# Altium PCB NanoEEG_v3.PcbDoc (part 2 of 2)
Units mm, origin at the board's own origin, x right, y up, seen from the top; angles counter-clockwise.
Board outline 66 x 52 mm, 4 copper layers (Top Layer, Gound Plane 1, Power Plane 1, Bottom Layer), stack 1.87 mm thick; 74 components, 80 nets, 375 pads, 142 vias.
Unrouted connection lines stored in the file: 89.
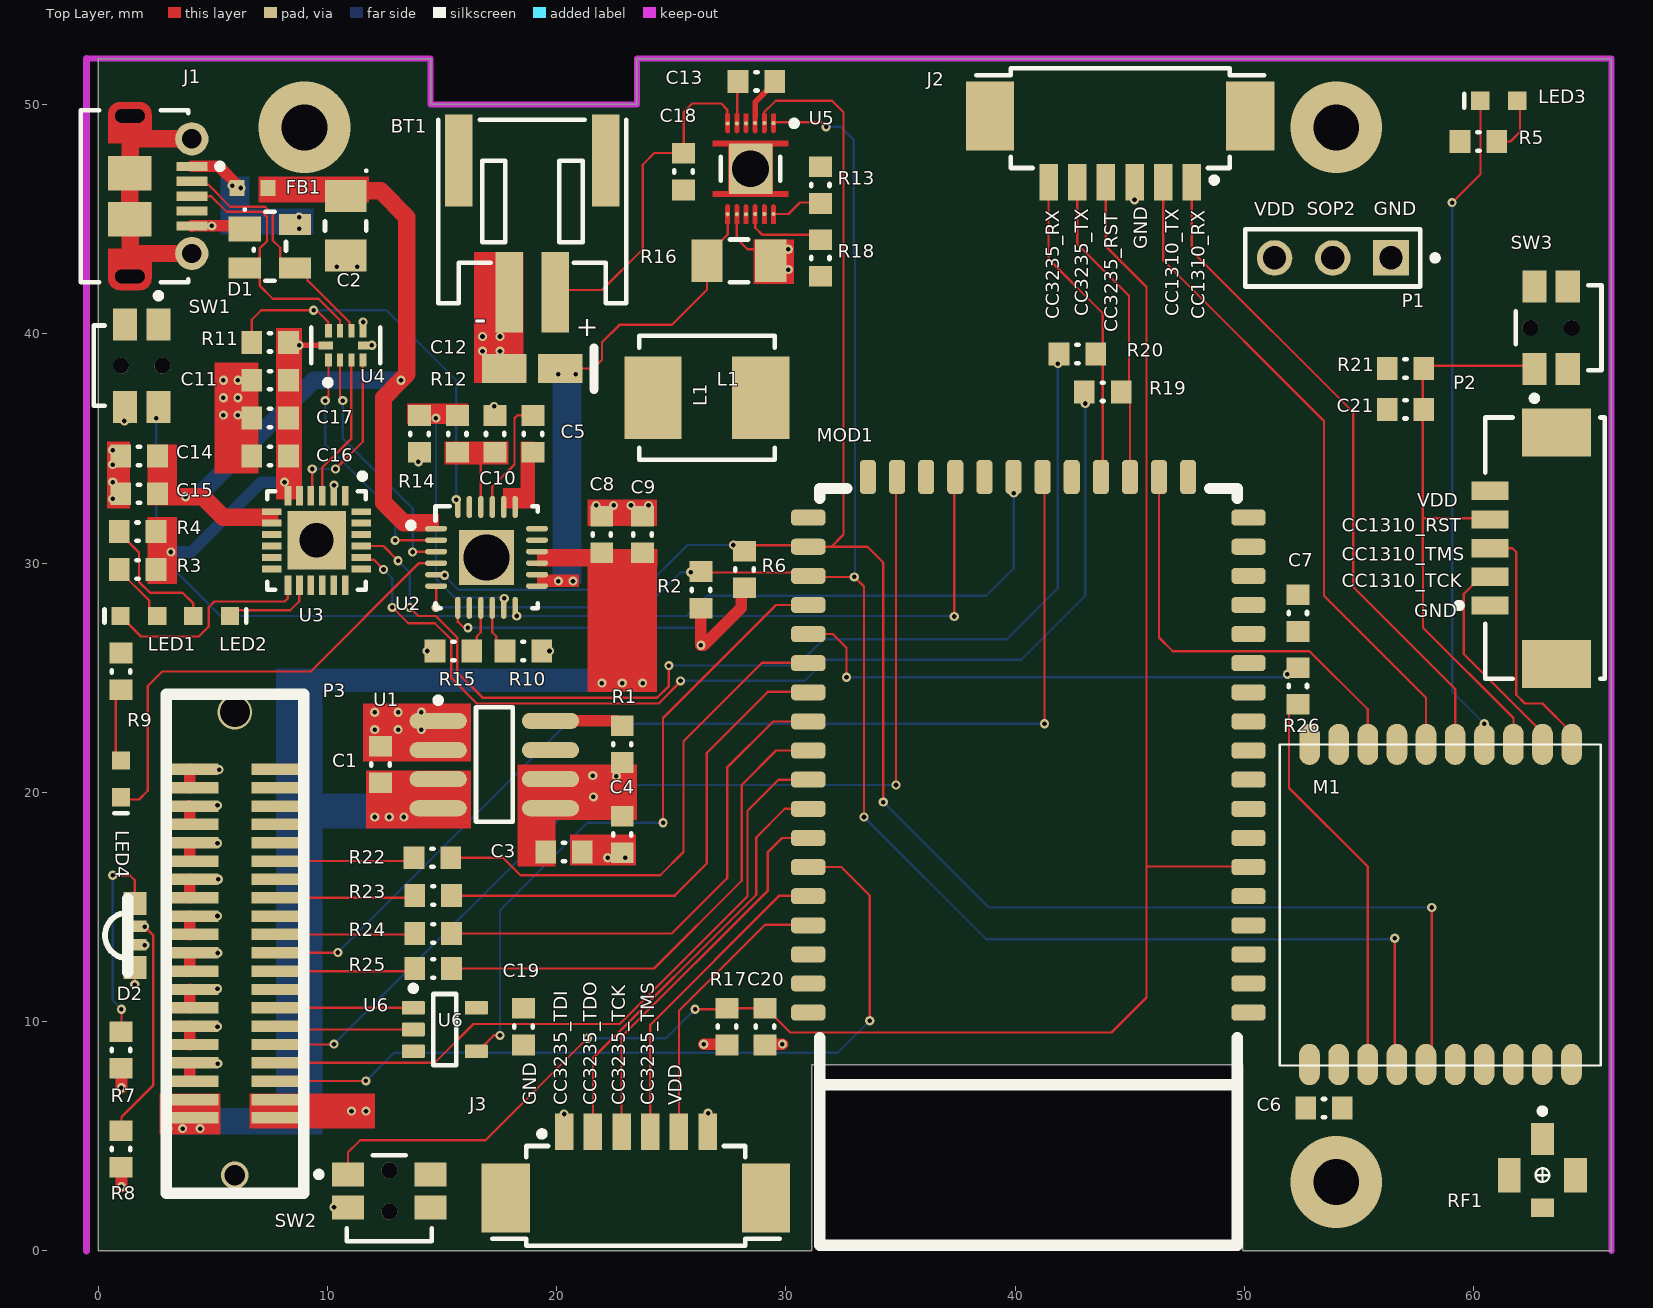
[diagram p0: Top Layer view]

## Via types
v1: diameter 0.4, hole 0.2, Top Layer to Bottom Layer, 136 vias
v2: diameter 4, hole 2, Top Layer to Bottom Layer, 3 vias
v3: diameter 2, hole 1.5, Top Layer to Bottom Layer, 1 vias
v4: diameter 1.2, hole 0.9, Top Layer to Bottom Layer, 1 vias
v5: diameter 1.5, hole 1.3, Top Layer to Bottom Layer, 1 vias

## Nets (pads, with @x,y where several pads share a name; then routed paths per layer and width w, separated by ;. In a path a pad name is that pad's centre, name@x,y a point inside that pad or via, vN(x,y) a via of type N, cw(c..) or ccw(c..) an arc to the next point about the centre after c; other vN are vias at no path point) (continued)
I2C_SDA_B: (continued)
  Top Layer w0.1: v1(14.732,28.067) 14.74,28.075 U2.6 ; R2.2 26.327,29.591 30.822,29.591 31.02,29.393 v1(32.979,29.393) 33.401,28.972 v1(33.401,18.923) ; 29.556,49.224 31.548,49.224 v1(31.75,49.022) ; v1(56.553,13.635) 56.553,8.217 M1.14
  Bottom Layer w0.1: v1(14.732,28.067) 23.876,28.067 25.409,29.6 v1(25.84,29.6) ; v1(31.75,49.022) 32.385,49.022 32.962,48.445 32.962,43.387 33.007,43.342 v1@33.007,29.35 ; v1(33.401,18.923) 38.735,13.589 56.507,13.589 v1(56.553,13.635)
INT2_ACCEL: MOD1.23
Mod1_nDRDY: P3.12 U6.2 | length 5.9
  Top Layer w0.1: P3.12 8.078,9.652 U6.2
Mod2_nCS: MOD1.24 P3.20 | length 48.3
  Top Layer w0.1: P3.20 10.441,13 v1(10.455,13.014) ; MOD1.24 41.275,33.668 v1(41.275,22.987)
  Bottom Layer w0.1: v1(10.455,13.014) 20.428,22.987 v1(41.275,22.987)
Mod2_nDRDY: P3.14 U6.1 | length 5.8
  Top Layer w0.1: P3.14 7.932,10.602 U6.1
Mod_MISO: P3.26 R23.2 | length 5.9
  Top Layer w0.1: P3.26 13.719,15.4 R23.2
Mod_MOSI: P3.22 R24.2 | length 5.9
  Top Layer w0.1: P3.22 13.77,13.8 R24.2
Mod_nCS: P3.18 R25.2 | length 5.9
  Top Layer w0.1: P3.18 13.694,12.2 R25.2
Mod_nDRDY: MOD1.34 U6.4 | length 28.4
  Top Layer w0.1: U6.4 16.526,8.672 17.253,9.398 v1(17.526,9.398) ; v1(24.638,18.669) 24.638,23.241 29.567,28.17 MOD1.34
  Bottom Layer w0.1: v1(17.526,9.398) 17.526,14.859 21.336,18.669 v1(24.638,18.669)
Mod_nPWDN: MOD1.40 P3.8 | length 30.3
  Top Layer w0.1: P3.8 14.677,8.2 16.371,9.894 22.745,9.894 28.321,15.469 28.321,19.197 29.674,20.55 MOD1.40
Mod_nRESET: MOD1.43 P3.6 | length 35.5
  Top Layer w0.1: P3.6 7.941,7.411 v1(11.677,7.411) ; MOD1.43 32.409,16.74 33.655,15.494 v1(33.655,10.033)
  Bottom Layer w0.1: v1(11.677,7.411) 12.901,8.636 32.258,8.636 v1(33.655,10.033)
Mod_SCLK: P3.30 R22.2 | length 5.9
  Top Layer w0.1: P3.30 13.63,17 R22.2
Mod_START: MOD1.29 P3.10 | length 45
  Top Layer w0.1: P3.10 10.27,9 v1(10.287,9.017) ; v1(34.798,20.32) 34.798,33.705 MOD1.29
  Bottom Layer w0.1: v1(10.287,9.017) 21.59,20.32 v1(34.798,20.32)
NetC5_1: C5.1 U2.21 | length 5.1
  Top Layer w0.1: U2.21 17.19,33.323 18.161,34.294 18.161,36.322 18.288,36.449 18.954,36.449 C5.1
NetC5_2: C5.2 L1.1 U2.19 U2.20
NetC13_2: C13.2 U5.5 | length 1.7
  Top Layer w0.1: 27.871,49.354 27.891,49.373 27.891,49.515 27.869,49.537 27.869,50.968 C13.2
NetD2_2: D2.2 R8.2 | length 9.6
  Top Layer w0.1: R8.2 1.016,5.261 1.016,5.842 2.409,7.235 2.409,13.76 v1(2.025,14.144)
NetD2_4: D2.4 R7.2 | length 9
  Top Layer w0.1: v1(0.635,16.383) 1.381,16.383 1.6,16.164 D2.4 ; R7.2 1.016,9.579 v1(1.016,10.541)
  Bottom Layer w0.1: v1(0.635,16.383) 0.635,10.922 v1(1.016,10.541)
NetIC1_12: 
NetLED1_2: LED1.2 R3.1 | length 2.7
  Top Layer w0.1: R3.1 0.922,29.668 2.228,28.362 2.228,28.036 LED1.2
NetLED2_2: LED2.2 R4.1 | length 5.9
  Top Layer w0.1: R4.1 0.922,31.319 1.786,30.455 1.786,29.175 2.259,28.702 3.683,28.702 4.153,28.232 LED2.2
NetLED3_2: LED3.2 R5.1 | length 2.5
  Top Layer w0.1: R5.1 61.595,48.387 62.014,48.806 LED3.2@62.014,50.165
NetLED4_2: LED4.2 R9.1 | length 3.1
  Top Layer w0.1: LED4.2@0.7,21.39 0.77,21.46 R9.1@0.77,24.473
NetM1_13: M1.13 R26.1 | length 17.3
  Top Layer w0.1: R26.1 51.943,23.457 51.943,20.193 55.372,16.764 M1.13
NetM1_19: M1.19 RF1.1
NetMOD1_36: MOD1.36 R22.1 | length 22.5
  Top Layer w0.1: R22.1 17.657,17.145 18.419,16.383 24.511,16.383 25.527,17.399 25.527,22.225 28.956,25.654 MOD1.36@30.869,25.654
NetMOD1_37: MOD1.37 R23.1 | length 22.2
  Top Layer w0.1: R23.1 25.146,15.494 26.543,16.891 26.543,21.717 29.21,24.384 MOD1.37@31.056,24.384
NetMOD1_38: MOD1.38 R24.1 | length 22.2
  Top Layer w0.1: R24.1 25.019,13.843 27.432,16.256 27.432,21.082 29.44,23.09 MOD1.38
NetMOD1_39: MOD1.39 R25.1 | length 21.9
  Top Layer w0.1: R25.1 24.243,12.319 28.067,16.143 28.067,20.32 29.567,21.82 MOD1.39
NetR10_2: R10.2 U2.10 | length 2.5
  Top Layer w0.1: U2.10 17.19,26.981 17.364,26.807 17.364,26.612 17.56,26.416 R10.2@17.695,26.416 ; R10.2@17.342,26.562 R10.2
NetR12_2: R12.2 R14.1 U2.11 | length 10.3
  Bottom Layer w0.1: v1(14.732,36.322) 14.732,29.312 15.552,28.492 17.673,28.492 v1(17.709,28.456)
PG_3.3VD: R1.1 U1.8 | length 3.2
  Top Layer w0.508: U1.8 22.594,23.114 22.81,22.898 R1.1
PGau_BIN: R18.1 U5.10 | length 3.7
  Top Layer w0.1: U5.10 28.656,44.623 28.956,44.323 31.28,44.323 R18.1
PGau_OUT: R13.2 U5.12 | length 2.3
  Top Layer w0.1: U5.12 30.111,45.224 30.607,45.72 31.458,45.72 R13.2
StatusLED_1: D2.3 MOD1.26 | length 0.7
  Top Layer w0.1: v1(1.595,11.611) 1.6,11.616 D2.3
StatusLED_2: D2.1 MOD1.28
  other v1: 2.032,13.335
SYS_PWR: C1.2 C8.2 C9.2 L1.2 P3.1 P3.3 U1.3 U1.4 U2.15 U2.16
  other v1: 3.048,5.334 3.683,5.334 4.445,5.334 12.065,18.923 12.7,18.923 13.335,18.923 21.971,24.765 22.86,24.765 23.749,24.765
VBUS: C2.1 C14.1 C15.1 FB1.1 U2.1 U3.7 U3.8 | length 34.1
  Top Layer w0.762: C15.1 2.713,32.893 v1(3.81,32.893) 4.572,32.893 5.461,32.004 6.604,32.004 ; C2.1@10.795,46.131 C2.1@11.019,46.355 ; C2.1@11.019,46.228 12.319,46.228 13.462,45.085 13.462,38.227 v1(13.208,37.973) 12.446,37.211 12.446,32.639 13.335,31.75 14.097,31.75
  Bottom Layer w0.762: v1(3.81,32.893) 4.318,32.893 9.398,37.973 v1(13.208,37.973)
VBUS_IN: D1.4 FB1.2 J1.1 | length 2.3
  Top Layer w0.508: J1.1 5.263,47.3 6.056,46.507 FB1.2@6.056,46.482
  other v1: 8.763,44.577 8.763,45.085 6.223,46.355 5.849,46.462
pads on no net: BT1.0 J1.4 J2.MP1 J2.MP2 J3.MP1 J3.MP2 M1.7 M1.9 M1.10 M1.16 M1.17 MOD1.2 MOD1.8 MOD1.9 MOD1.10 MOD1.11 MOD1.12 MOD1.47 P2.MP1 P2.MP2 P3.16 P3.24 P3.28 P3.32 P3.34 P3.36 P3.38 P3.40 SW1. SW1.1 SW1.2 SW2. SW2.1' SW2.2' SW3. SW3.1' SW3.2' U1.7 U2.23 U3.1 U3.9 U3.10 U3.11 U3.12 U3.15 U3.16 U3.18 U3.19 U3.22 U3.23 U3.24 U5.4 U5.9 U5.11
copper on no net:
  other v2: 54,3 9,49 54,49
  other v4: 5.965,3.3
  other v5: 5.965,23.5

## Polygon pours and split planes (outlines as drawn)
no net on Gound Plane 1 (split plane): 65.49,0.51 50.421,0.51 50.421,8.128 50.412,8.228 50.383,8.323 50.335,8.412 50.272,8.489 50.195,8.552 50.106,8.6 50.011,8.629 49.911,8.638 31.115,8.638 31.015,8.629 30.92,8.6 30.831,8.552 30.754,8.489 30.691,8.412 30.643,8.323 30.614,8.228 30.605,8.128 30.605,0.51 0.51,0.51 0.51,51.49 13.99,51.49 13.99,50 13.999,49.9 14.028,49.805 14.076,49.716 14.139,49.639 14.216,49.576 14.305,49.528 14.4,49.499 14.5,49.49 23.5,49.49 23.6,49.499 23.695,49.528 23.784,49.576 23.861,49.639 23.924,49.716 23.972,49.805 24.001,49.9 24.01,50 24.01,51.49 65.49,51.49
no net on Power Plane 1 (split plane): 65.49,0.51 50.421,0.51 50.421,8.128 50.412,8.228 50.383,8.323 50.335,8.412 50.272,8.489 50.195,8.552 50.106,8.6 50.011,8.629 49.911,8.638 31.115,8.638 31.015,8.629 30.92,8.6 30.831,8.552 30.754,8.489 30.691,8.412 30.643,8.323 30.614,8.228 30.605,8.128 30.605,0.51 0.51,0.51 0.51,51.49 13.99,51.49 13.99,50 13.999,49.9 14.028,49.805 14.076,49.716 14.139,49.639 14.216,49.576 14.305,49.528 14.4,49.499 14.5,49.49 23.5,49.49 23.6,49.499 23.695,49.528 23.784,49.576 23.861,49.639 23.924,49.716 23.972,49.805 24.001,49.9 24.01,50 24.01,51.49 65.49,51.49

## Keep-outs
Keep-Out Layer:
  lines w0.254: -0.5,52 14.5,52 14.5,50 23.5,50 23.5,52 ; 23.503,52 66,52 66,0
  lines w0.3: -0.5,0 -0.5,52

## Other copper
Top Layer:
  rectangle net BATT_IN: 28.581,42.174 30.353,44.116
  rectangle net GND: 16.383,37.846 18.542,43.561
  rectangle net 3.3VD: 6.604,5.334 12.065,6.858
  rectangle net SYS_PWR: 2.667,5.08 5.334,6.858
  rectangle net GND: 20.574,16.797 23.447,18.161
  rectangle net 3.3VD: 18.288,18.796 23.495,21.209
  rectangle net 3.3VD: 18.288,16.764 19.939,21.082
  rectangle net GND: 11.557,21.336 16.256,23.876
  rectangle net SYS_PWR: 11.684,18.415 16.256,20.955
  rectangle net SYS_PWR: 21.336,24.384 24.384,30.353
  region net GND: 24.384,32.766 21.336,32.766 21.336,31.623 24.384,31.623
  rectangle net GND: 0.381,32.385 1.397,35.306
  rectangle net NetR12_2: 13.462,36.068 16.129,36.957
  rectangle net BQ_REGN: 15.113,34.29 17.907,35.306
  rectangle net NetC5_2: 18.415,32.385 19.05,35.306
  rectangle net NetC5_2: 17.653,32.385 19.05,33.274
  rectangle net VBUS: 6.223,31.623 7.874,32.385
  rectangle net GND: 5.08,33.909 6.985,38.735
  rectangle net VBUS: 6.985,45.72 11.811,46.863
  rectangle net CP2102_VDD: 2.159,29.083 3.429,32.004
  rectangle net VBUS: 2.159,32.512 3.429,35.179
  rectangle net VBUS: 13.47,31.369 14.867,32.131
  rectangle net BATT_Gau_OUT: 19.14,28.956 20.963,29.496
  rectangle net SYS_PWR: 19.14,29.845 24.392,30.607
  rectangle net CP2102_VDD: 7.747,32.766 8.89,40.259
Bottom Layer:
  rectangle net SYS_PWR: 2.667,5.08 9.779,6.223
  rectangle net SYS_PWR: 7.747,18.415 13.97,19.939
  rectangle net SYS_PWR: 7.747,5.08 9.779,25.4
  rectangle net SYS_PWR: 9.652,24.384 24.384,25.4
  rectangle net VBUS_IN: 5.334,44.323 9.398,45.466
  rectangle net VBUS_IN: 5.334,44.323 6.604,46.863
  rectangle net BATT_Gau_OUT: 19.82,29.083 21.082,38.608

## Silkscreen, mask and mechanical layers (free items; w line width, h text height)
Top Overlay:
  text "VDD" at 50.42,44.958 h1
  text "SOP2" at 52.705,44.968 h1
  text "GND" at 55.626,44.968 h1
  text "GND" at 45.964,43.688 h1 r90
  text "String" at 69.215,42.86 h1
  text "CC3235_TX" at 43.383,40.767 h1 r90
  text "CC1310_TX" at 47.32,40.767 h1 r90
  text "CC3235_RX" at 42.113,40.64 h1 r90
  text "CC1310_RX" at 48.463,40.64 h1 r90
  text "CC3235_RST" at 44.664,40.075 h1 r90
  text "-" at 16.383,39.748 h2
  text "+" at 20.828,39.596 h1.5
  text "String" at 69.215,38.161 h1
  text "VDD" at 57.532,32.258 h1
  text "CC1310_RST" at 54.229,31.166 h1
  text "CC1310_TMS" at 54.229,29.896 h1
  text "CC1310_TCK" at 54.229,28.753 h1
  text "GND" at 57.404,27.442 h1
  text "GND" at 19.294,6.35 h1 r90
  text "CC3235_TDI" at 20.65,6.35 h1 r90
  text "CC3235_TDO" at 21.941,6.35 h1 r90
  text "CC3235_TCK" at 23.19,6.35 h1 r90
  text "CC3235_TMS" at 24.46,6.35 h1 r90
  text "VDD" at 25.654,6.351 h1 r90
Mechanical 1:
  the board outline again, w0.254
Drill Drawing:
  rectangle: 19.177,31.623 21.59,32.766
  rectangle: 19.177,30.861 19.939,32.766